# Altium PCB PPG.PcbDoc
Units mm, origin at the board's own origin, x right, y up, seen from the top; angles counter-clockwise.
Board outline 60.19 x 60.19 mm, 2 copper layers (Top Layer, Bottom Layer); 30 components, 27 nets, 107 pads, 22 vias.
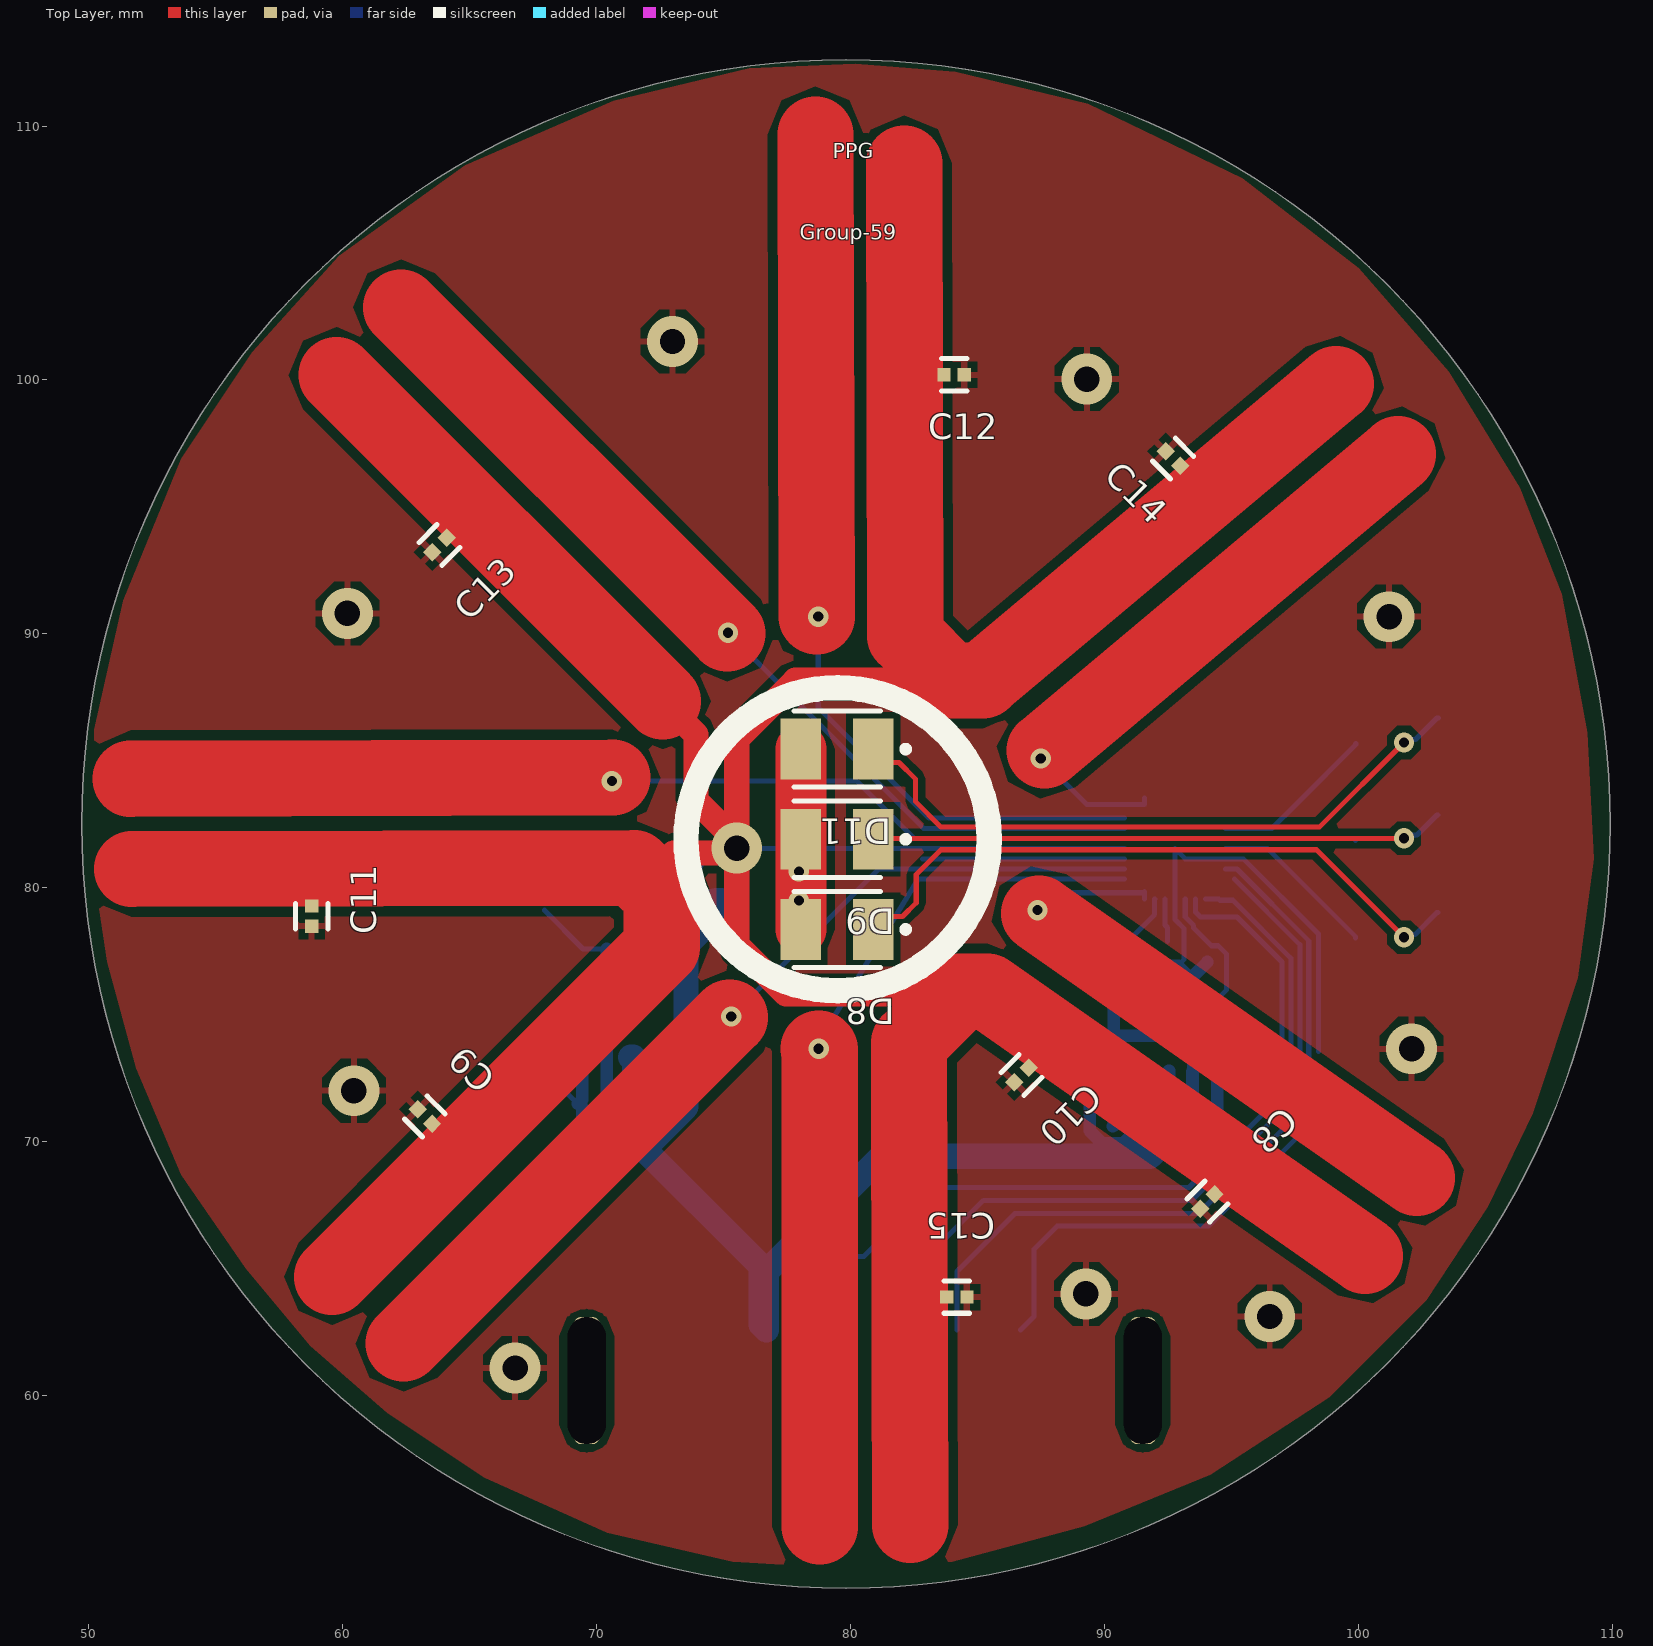
[diagram p0: Top Layer view]
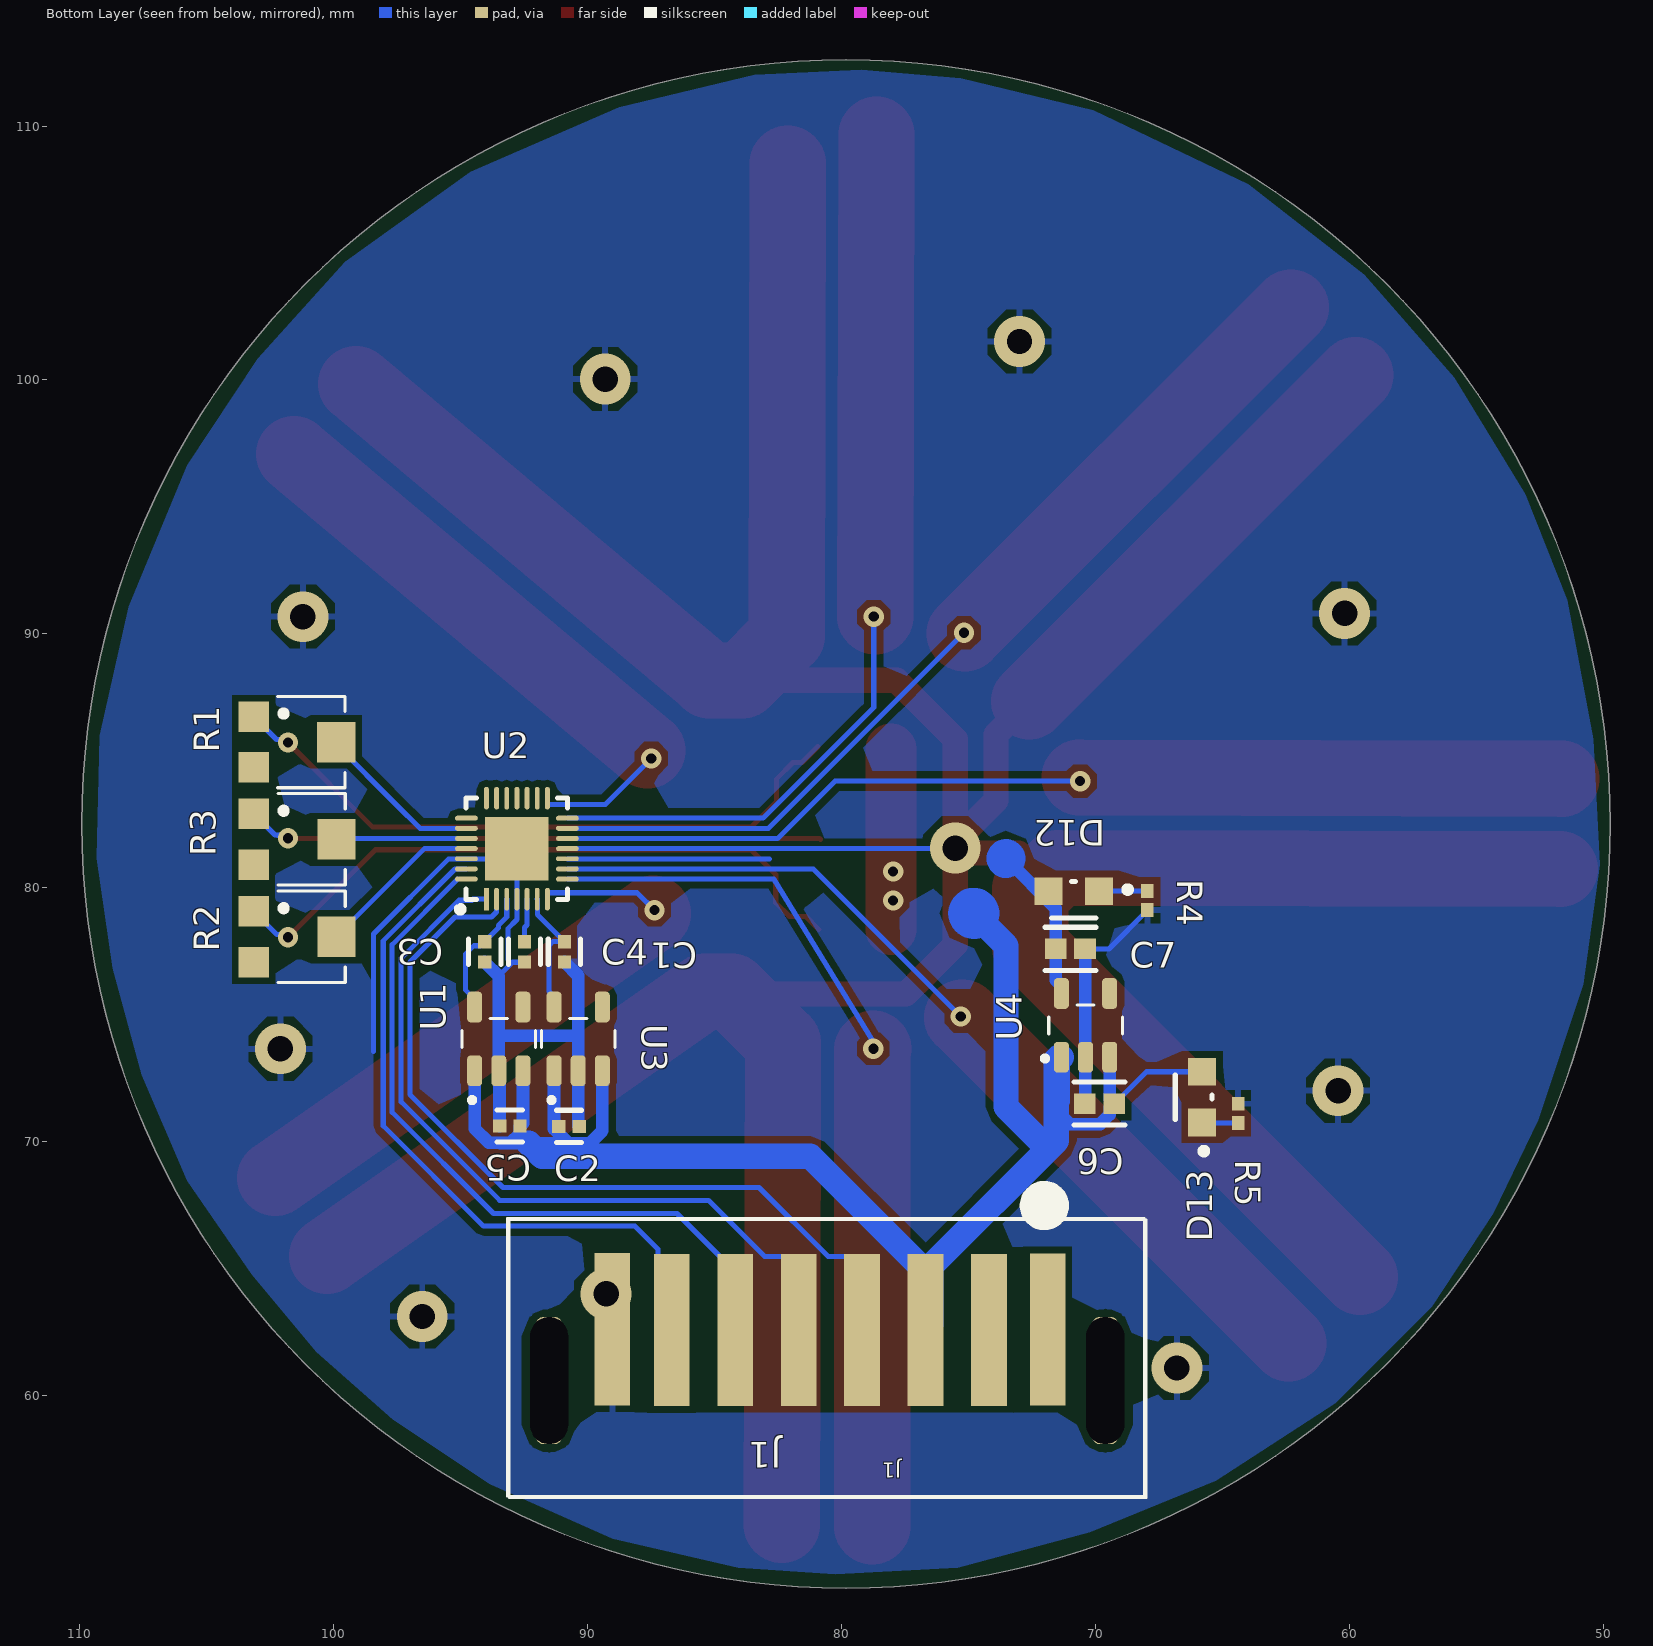
[diagram p1: Bottom Layer view, seen from below]
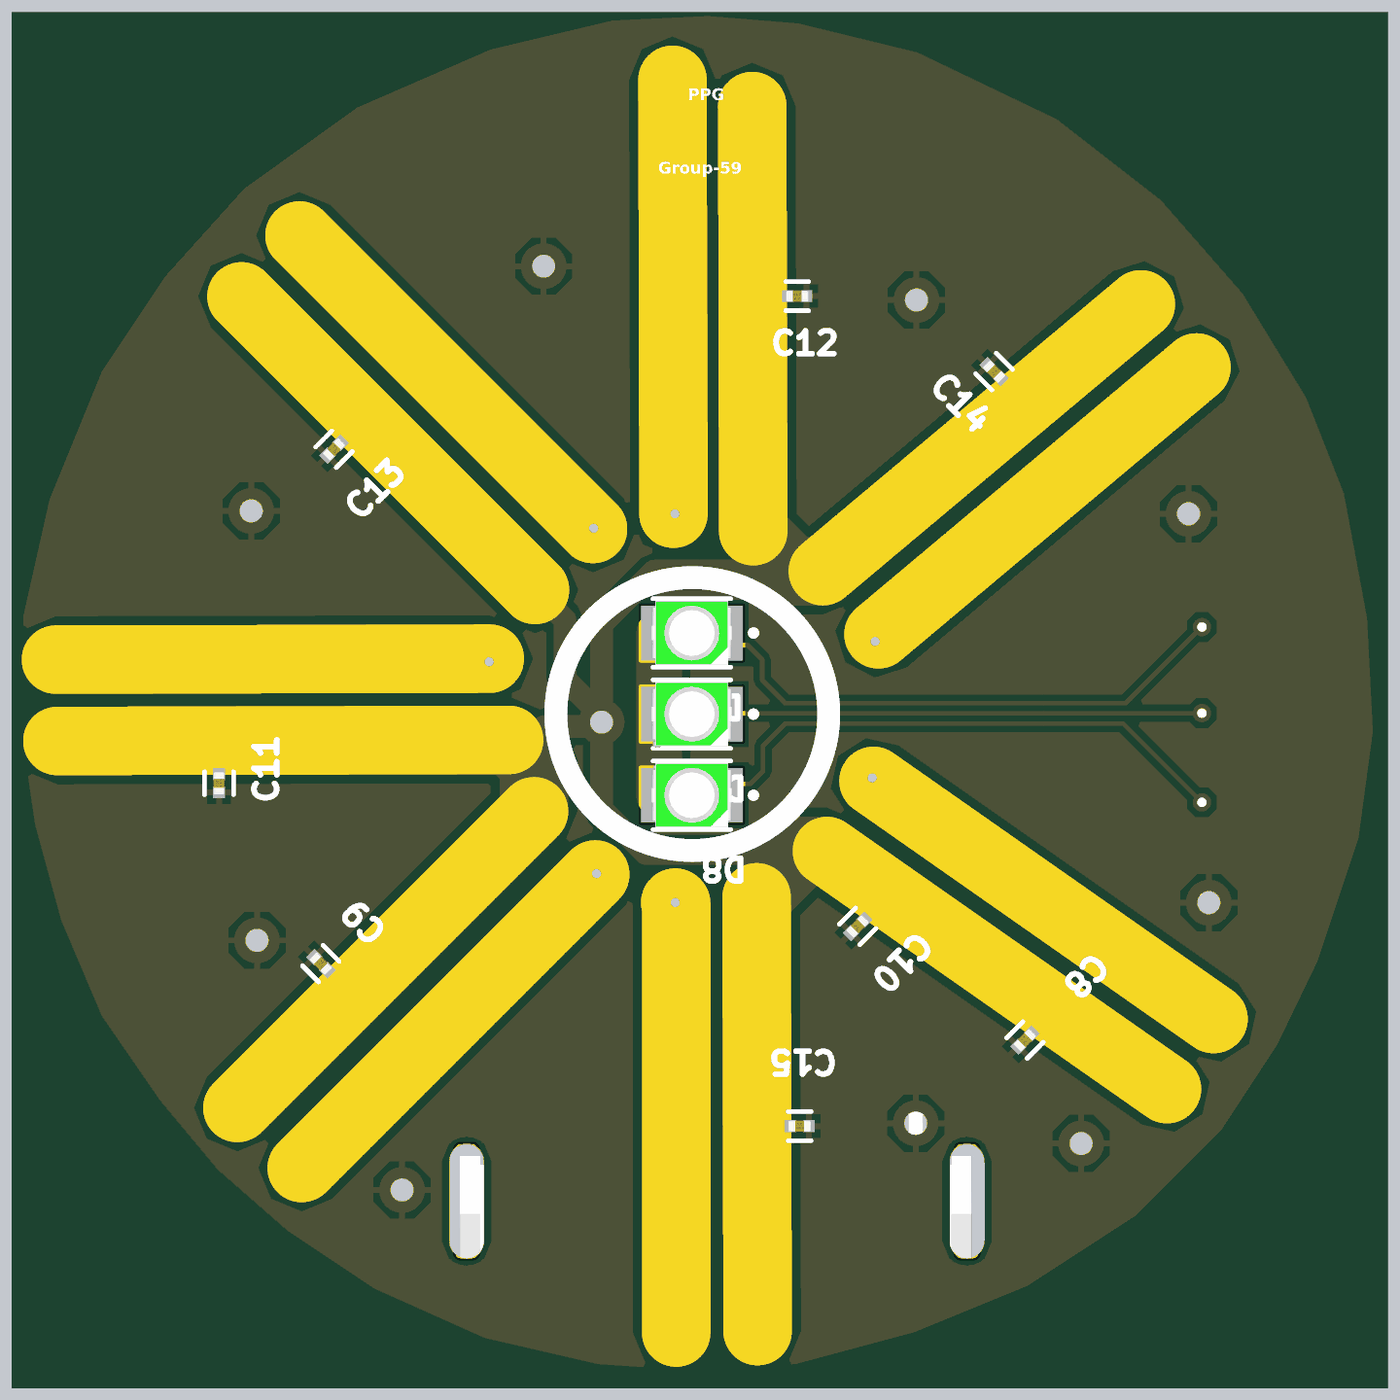
[diagram p2: 3D render of the assembled board from above, using the file's embedded part models]
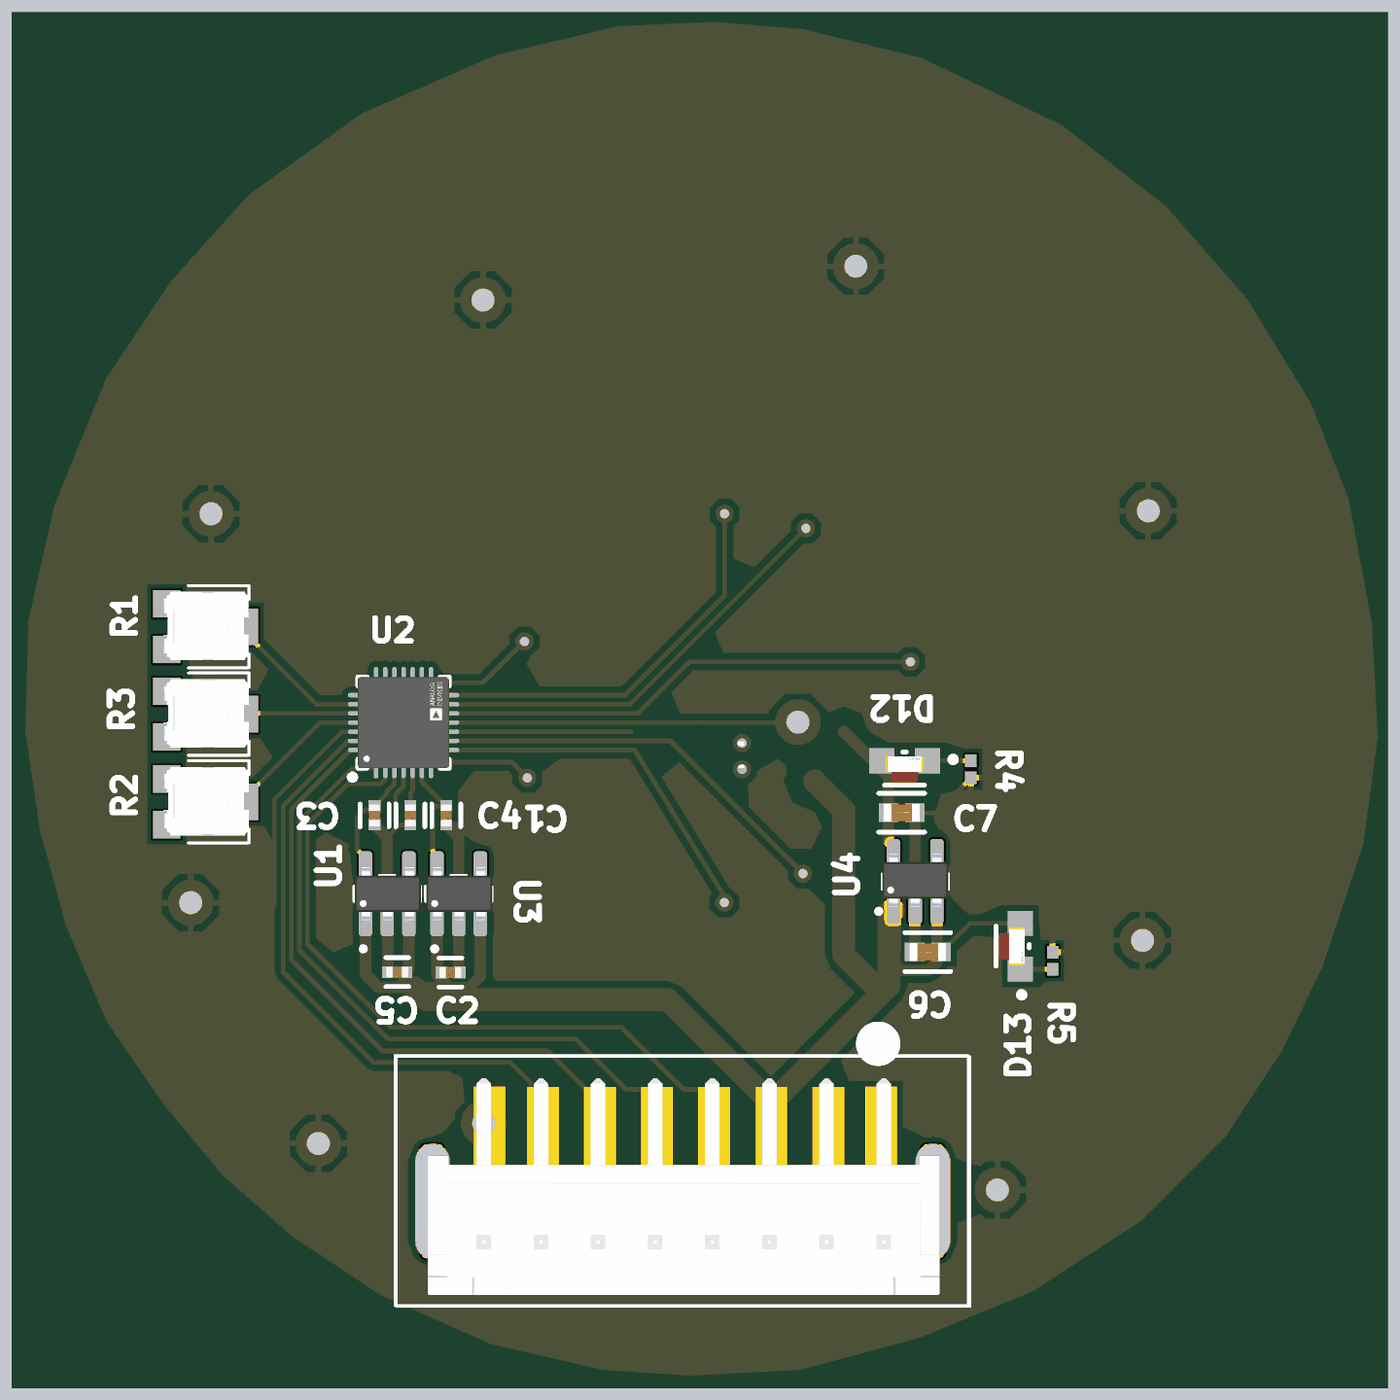
[diagram p3: 3D render of the assembled board from below, using the file's embedded part models]

## Layer stack, top to bottom
Top Solder: solder mask 0.0102, Solder Resist, Dk 3.5
Top Layer: signal copper 0.0356
Dielectric 1: dielectric 0.32, FR-4, Dk 4.8
Bottom Layer: signal copper 0.0356
Bottom Solder: solder mask 0.0102, Solder Resist, Dk 3.5

## Board outline
79.833,52.418 cw(c79.833,82.512) 49.738,82.512 cw(c79.833,82.512) 79.833,112.607 cw(c79.833,82.512) 109.927,82.512 cw(c79.833,82.512)

## Design rules (kind name [scope] priority, off if disabled: settings)
Clearance [All] p1: gap=0.254 ignorepadtopadclearanceinfootprint=FALSE except(0: Arc-Hole Track-Hole SMDPad-Hole THPad-Hole Via-Hole Fill-Hole Poly-Hole Region-Hole Text-Hole; 0.152: Arc-Arc Arc-Track Arc-SMDPad Track-Track Track-SMDPad SMDPad-SMDPad)
ComponentClearance [All] p1: gap=0.1 collisioncheckmode=3 verticalgap=2540 showdistances=FALSE
MinimumSolderMaskSliver [All] p1: minsoldermaskwidth=0.152
PolygonConnect [All] p1: connectstyle=Relief reliefconductorwidth=0.254 reliefentries=4 polygonreliefangle="90 Angle" airgapwidth=0.254
RoomDefinition PPG [InComponentClass('PPG')] p1: confinementstyle=ConfineIn formatcopy=TRUE lockcomponents=FALSE outline 5.842,46.482 112.522,46.482 112.522,113.538 5.842,113.538
RoutingVias [All] p1: holewidth=0.711 width=1.27 viastyle="Through Hole" minholewidth=0.711 minwidth=1.27 maxholewidth=0.711 maxwidth=1.27
SolderMaskExpansion [All] p1: expansion=0.102 istentingtop=FALSE
Width [All] p1: maxlimit=5 minlimit=0.152 preferedwidth=0.254
28 further rules are at their usual default settings.

## Components (designator, comment, footprint, x,y, rotation, side; value= is the part's Value field where it differs from the comment)
C1 "C0402C104K3RACTU" FP-C0402-BB-MFG 90.922,77.478 r270 bottom value="0.10 μF"
C2 "C0402C104K3RACTU" FP-C0402-BB-MFG 90.741,70.604 r180 bottom value="0.10 μF"
C3 "C0402C104K3RACTU" FP-C0402-BB-MFG 94.062,77.478 r270 bottom value="0.10 μF"
C4 "C0402C104K3RACTU" FP-C0402-BB-MFG 92.492,77.478 r270 bottom value="0.10 μF"
C5 "C0402C104K3RACTU" FP-C0402-BB-MFG 93.065,70.62 r0 bottom value="0.10 μF"
C6 "EMK107B7105KA-T" FP-0603-L_1_6_0_1-W_0_8_0-IPC_C 69.85,71.501 r0 bottom value=1uF
C7 "EMK107B7105KA-T" FP-0603-L_1_6_0_1-W_0_8_0-IPC_C 70.993,77.597 r180 bottom value=1uF
C8 "C0402C104K3RACTU" FP-C0402-BB-MFG 94.062,67.646 r225 top value="0.10 μF"
C9 "C0402C104K3RACTU" FP-C0402-BB-MFG 63.246,70.993 r135 top value="0.10 μF"
C10 "C0402C104K3RACTU" FP-C0402-BB-MFG 86.74,72.625 r225 top value="0.10 μF"
C11 "C0402C104K3RACTU" FP-C0402-BB-MFG 58.791,78.886 r270 top value="0.10 μF"
C12 "C0402C104K3RACTU" FP-C0402-BB-MFG 84.093,100.203 r0 top value="0.10 μF"
C13 "C0402C104K3RACTU" FP-C0402-BB-MFG 63.824,93.505 r45 top value="0.10 μF"
C14 "C0402C104K3RACTU" FP-C0402-BB-MFG 92.71,96.901 r315 top value="0.10 μF"
C15 "C0402C104K3RACTU" FP-C0402-BB-MFG 84.201,63.881 r180 top value="0.10 μF"
D8 "150141GS73100" WL-SMTW_3528 79.481,78.361 r180 top
D9 "150141GS73100" WL-SMTW_3528 79.481,81.911 r180 top
D11 "150141GS73100" WL-SMTW_3528 79.481,85.461 r180 top
D12 "LTST-S270KRKT" FP-LTST-S270KRKT-MFG 70.866,79.629 r0 bottom
D13 "LTST-S270KRKT" FP-LTST-S270KRKT-MFG 66.04,71.755 r90 bottom
J1 "S8B-XH-A(LF)(SN)" S8B-XH-A 69.149,60.322 r0 bottom
R1 "TC33X-2-103E" TC33X-2-103E 101.333,85.738 r180 bottom value=10kR
R2 "TC33X-2-103E" TC33X-2-103E 101.329,78.074 r180 bottom value=10kR
R3 "TC33X-2-103E" TC33X-2-103E 101.329,81.911 r180 bottom value=10kR
R4 "RK73H1ETTP1001F" RESC1005X40X25LL10T10 67.966,79.502 r90 bottom value=1kR
R5 "RK73H1ETTP1001F" RESC1005X40X25LL10T10 64.389,71.12 r270 bottom value=1kR
U1 "LP5907MFX-1.8/NOPB" LP5907MFX-1.8/NOPB 90.379,74.049 r90 bottom
U2 "ADPD1080WBCPZR7" ADPD1080WBCPZR7 92.792,81.542 r90 bottom
U3 "LP5907MFX-1.8/NOPB" LP5907MFX-1.8/NOPB 93.507,74.049 r90 bottom
U4 "LP5907MFX-3.3/NOPB" 296-38557-1-ND 70.485,74.676 r90 bottom

## Footprints (in the part's own frame and the unit in brackets; to place one, negate y for a bottom-side part, rotate by r counter-clockwise, add the part's x,y. Pads: shape width x height; smd on the part's side, far side on the other; paste and mask are expansions set on the pad)
296-38557-1-ND [mm]
  rrect50% 1.21x0.59 smd: 1(-1.346,0.864) 2(-1.346,-0.086) 3(-1.346,-1.036) 4(1.164,-1.036) 5(1.164,0.864)
  silkscreen extent -1.5,-1.54 0.71,1.61, body extent -1.44,-1.53 1.36,1.37, height 1.31
ADPD1080WBCPZR7 [mm]
  rect 0.894x0.192 smd paste+0 mask+0: 1(-1.989,1.2)
  rrect100% 0.894x0.192 smd paste+0 mask+0: 2(-1.989,0.8) 3(-1.989,0.4) 4(-1.989,0) 5(-1.989,-0.4) 6(-1.989,-0.8) 7(-1.989,-1.2) 15(1.989,-1.2) 16(1.989,-0.8) 17(1.989,-0.4) 18(1.989,0) 19(1.989,0.4) 20(1.989,0.8) 21(1.989,1.2)
  rrect100% 0.192x0.894 smd paste+0 mask+0: 8(-1.2,-1.989) 9(-0.8,-1.989) 10(-0.4,-1.989) 11(0,-1.989) 12(0.4,-1.989) 13(0.8,-1.989) 14(1.2,-1.989) 22(1.2,1.989) 23(0.8,1.989) 24(0.4,1.989) 25(0,1.989) 26(-0.4,1.989) 27(-0.8,1.989) 28(-1.2,1.989)
  rect 2.5x2.5 smd paste-1000 mask+0: 29(0,0)
  silkscreen extent -2.51,-2 2,2.36, body extent -2,-2 2,2, height 0.8
FP-0603-L_1_6_0_1-W_0_8_0-IPC_C [mm]
  rect 0.858x0.812 smd paste+0 mask+0: 1(-0.577,0) 2(0.577,0)
  silkscreen extent -1.01,-0.85 1.01,0.85, body extent -0.8,-0.4 0.8,0.4, height 0.9
FP-C0402-BB-MFG [mm]
  rect 0.52x0.52 smd paste+0 mask+0: 1(-0.4,0) 2(0.4,0)
  silkscreen extent -0.5,-0.64 0.5,0.64, body extent -0.5,-0.25 0.5,0.25, height 0.55
FP-LTST-S270KRKT-MFG [mm]
  rect 1.1x1.1 smd paste+0 mask+0: 1(-1,-0.235) 2(1,-0.235)
  silkscreen extent -2.25,-0.63 0.87,0.82, body extent -0.82,-0.44 0.82,0.71, height 0.6
LP5907MFX-1.8/NOPB [mm]
  rrect50% 1.21x0.59 smd mask+0: 1(-1.255,0.95) 2(-1.255,0) 3(-1.255,-0.95)
  rrect50% 1.21x0.59 smd: 4(1.255,-0.95) 5(1.255,0.95)
  silkscreen extent -2.51,-1.45 0.8,1.45, body extent -1.4,-1.48 1.4,1.42, height 1.31
RESC1005X40X25LL10T10 [mm] "Chip Resistor, 2-Leads, Body 1.00x0.50mm, IPC High Density"
  rect 0.55x0.5 smd: 1(-0.375,0) 2(0.375,0)
  body extent -0.55,-0.3 0.55,0.3, height 0.4
S8B-XH-A [mm]
  rect 1.4x6 smd paste-1000 mask+0: 1(2.743,-2.285) 2(5.053,-2.265) 3(7.553,-2.265) 4(10.053,-2.265) 5(12.553,-2.265) 6(15.053,-2.265) 7(17.553,-2.265) 8(19.886,-2.288)
  rrect50% 1x5 hole 1.5 slot 5 at 90 deg: 25(0.476,-0.273) 25(22.376,-0.273)
  silkscreen extent -1.14,-7.63 24.03,4.34, body extent 0.18,-5.66 22.58,3.84, height 9.53
TC33X-2-103E [mm]
  rect 1.2x1.2 smd: 1(-1.825,1) 3(-1.825,-1)
  rect 1.5x1.6 smd: 2(1.425,0)
  silkscreen extent -0.88,-1.8 1.77,1.8, body extent -1.97,-1.47 1.83,1.53, height 1.1
WL-SMTW_3528 [mm] "SMD Mono-color TOP LED, body 3.2x2.8mm"
  rect 1.6x2.4 smd: 1(-1.425,0) 2(1.425,0)
  silkscreen extent -2.83,-1.5 1.7,1.5, body extent -1.75,-1.4 1.75,1.4, height 1.9

## Part data
C1 C2 C3 C4 C5 C8 C9 C10 C11 C12 C13 C14 C15: library part CMP-03020-012858-1, "Cap Ceramic 0.1uF 25V X7R 10% Pad SMD 0402 125C T/R", Capacitance="0.10 μF", Case Code (Imperial)=0402, Case Code (Metric)=1005, Dielectric=X7R, Dielectric Material=4241ConductorMaterial, Manufacturer=Kemet, Max Operating Temperature=125°C, Min Operating Temperature=-55°C, Package=C0402-BB, Supplier Part Number=399-14148-1-ND, Temperature="-55°C to +125°C", Temperature Coefficient=15%, Temperature Range High=+125°C, Tolerance=0.1, Voltage Rating="25 V", Voltage Rating (DC)=25V, Automotive=No, Case/Package=0402, Category=Cap, ComponentLink1Description=http://www.farnell.com/datasheets/2746129.pdf?src-supplier=Farnell, ComponentLink1URL=http://www.farnell.com/datasheets/2746129.pdf?src-supplier=Farnell, ComponentLink2Description=Datasheet, ComponentLink2URL=https://content.kemet.com/datasheets/KEM_C1002_X7R_SMD.pdf, ComponentLink3Description=http://www.farnell.com/datasheets/2746129.pdf?src-supplier=Newark, ComponentLink3URL=http://www.farnell.com/datasheets/2746129.pdf?src-supplier=Newark, ComponentLink4Description=http://www.farnell.com/datasheets/2746129.pdf?src-supplier=Element14, ComponentLink4URL=http://www.farnell.com/datasheets/2746129.pdf?src-supplier=Element14, ComponentLink5Description=https://datasheet.octopart.com/C0402C104K3RACTU-Kemet-datasheet-62095741.pdf?src-supplier=Element14, ComponentLink5URL=https://datasheet.octopart.com/C0402C104K3RACTU-Kemet-datasheet-62095741.pdf?src-supplier=Element14, ComponentLink6Description=https://api.kemet.com/component-edge/download/datasheet/C0402C104K3RAC7867.pdf?src-supplier=Digikey, ComponentLink6URL=https://api.kemet.com/component-edge/download/datasheet/C0402C104K3RAC7867.pdf?src-supplier=Digikey, ComponentLink7Description=https://datasheet.octopart.com/C0402C104K3RACTU-KEMET-datasheet-176289272.pdf?src-supplier=Newark, ComponentLink7URL=https://datasheet.octopart.com/C0402C104K3RACTU-KEMET-datasheet-176289272.pdf?src-supplier=Newark, ComponentLink8Description=https://datasheet.octopart.com/C0402C104K3RACTU-KEMET-datasheet-157246124.pdf?src-supplier=Electro+Sonic, ComponentLink8URL=https://datasheet.octopart.com/C0402C104K3RACTU-KEMET-datasheet-157246124.pdf?src-supplier=Electro+Sonic, Device Class L1="Passive Components", Device Class L2=Capacitors, Device Class L3="Ceramic Capacitors", Digikey Description="Cap Ceramic 0.1uF 25V X7R 10% Pad SMD 0402 125C T/R", Height=0.55mm, Ipc Land Pattern Name=CAPC10050X50, Lead Free=Yes, Manufacturer Part Number=C0402C104K3RACTU, Material=Ceramic, Mouser Description="Cap Ceramic 0.1uF 25V X7R 10% Pad SMD 0402 125C T/R", Octopart=https://octopart.com/c0402c104k3ractu-kemet-71105629, Packaging="Cut Tape", Pins=2NUMBER, Pricing="1=0.16, 10=0.095, 100=0.0611, 1000=0.04279, 2500=0.03794, 5000=0.0349 (USD)", Reach SVHC Compliant=No, RoHS=TRUE, RoHS Compliant=Yes, Stock=453452, Supplier=Digikey, Temperature Characteristic=X7R, Temperature Range Low=-55°C
C6 C7: library part CMP-14477-000018-3, "None", Capacitance=1uF, Case Code (Imperial)=0603, Case Code (Metric)=1608, Dielectric=X7R, Manufacturer="Taiyo Yuden", Max Operating Temperature=125°C, Min Operating Temperature=-55°C, Package Quantity=1, Resistor Type=Ceramic, Supplier Part Number=587-1241-1-ND, Tolerance=10%, Voltage Rating=16V, Case/Package=0603, Category="Ceramic Capacitors", ComponentLink1Description=https://datasheet.ciiva.com/5815/1697718-5815968.pdf?src-supplier=Farnell, ComponentLink1URL=https://datasheet.ciiva.com/5815/1697718-5815968.pdf?src-supplier=Farnell, ComponentLink2Description=https://datasheet.ciiva.com/30212/193emk107b7105ka-t-30212019.pdf?src-supplier=Onlinecomponents.com, ComponentLink2URL=https://datasheet.ciiva.com/30212/193emk107b7105ka-t-30212019.pdf?src-supplier=Onlinecomponents.com, ComponentLink3Description=https://datasheet.ciiva.com/15920/966emk107b7105ka-t-15920470.pdf?src-supplier=Onlinecomponents.com, ComponentLink3URL=https://datasheet.ciiva.com/15920/966emk107b7105ka-t-15920470.pdf?src-supplier=Onlinecomponents.com, ComponentLink4Description=https://datasheet.ciiva.com/30137/126emk107b7105ka-t-30137199.pdf?src-supplier=Onlinecomponents.com, ComponentLink4URL=https://datasheet.ciiva.com/30137/126emk107b7105ka-t-30137199.pdf?src-supplier=Onlinecomponents.com, ComponentLink5Description=https://datasheet.ciiva.com/132/emk107b7105ka-t-ss-132544.pdf?src-supplier=Digikey, ComponentLink5URL=https://datasheet.ciiva.com/132/emk107b7105ka-t-ss-132544.pdf?src-supplier=Digikey, ComponentLink6Description=https://datasheet.ciiva.com/26871/getdatasheetpartid-637486-26871306.pdf?src-supplier=Verical, ComponentLink6URL=https://datasheet.ciiva.com/26871/getdatasheetpartid-637486-26871306.pdf?src-supplier=Verical, ComponentLink7Description=https://datasheet.ciiva.com/7657/1697718-7657322.pdf?src-supplier=Element14, ComponentLink7URL=https://datasheet.ciiva.com/7657/1697718-7657322.pdf?src-supplier=Element14, ComponentLink8Description=https://datasheet.ciiva.com/7975/746258-7975612.pdf?src-supplier=Element14, ComponentLink8URL=https://datasheet.ciiva.com/7975/746258-7975612.pdf?src-supplier=Element14, Construction=Flat, Contact Plating=Nickel, Depth=0.8mm, Halogen Free="Halogen Free", Height=0.8mm, Lead Free="Lead Free", Length=1.6mm, Manufacturer Part Number=EMK107B7105KA-T, Material=4241ConductorMaterial, Mount="Surface Mount", Mounting Technology="Surface Mount", Number of Pins=2, Packaging="Tape and Reel", Pins=2, Pricing="1=0.08, 10=0.027, 50=0.022, 100=0.0168, 500=0.0152, 1000=0.0136 (USD)", Radiation Hardening=No, REACH SVHC="No SVHC", Reach SVHC Compliant=No, RoHS=Yes, RoHS Compliant=Yes, Series=M, Stock=1580663, Supplier=Digikey, Termination=SMD/SMT, Thickness=0.035inch, Voltage Rating (DC)=16V, Width=0.031inch
D8 D9 D11: library part CMP-1429-00004-2, Case Code (Imperial)=1411, Case Code (Metric)=3528, Color=Green, Forward Current=100mA, Forward Voltage=3.1V, Lens Color=Colorless, Manufacturer="Wurth Electronics", Max Operating Temperature=85°C, Max Reverse Voltage (DC)=5V, Min Operating Temperature=-40°C, Package Quantity=1, Power Dissipation=105mW, Supplier Part Number=732-4997-1-ND, Test Current=20mA, Case/Package=3528, Category=LEDs, ComponentLink1Description=https://datasheet.ciiva.com/23843/150141gs73100-23843266.pdf?src-supplier=Newark, ComponentLink1URL=https://datasheet.ciiva.com/23843/150141gs73100-23843266.pdf?src-supplier=Newark, ComponentLink2Description=https://datasheet.ciiva.com/29278/759463-da-01-en-smd-topled-einf-gruen-150141gs73100-29278953.pdf?src-supplier=Conrad, ComponentLink2URL=https://datasheet.ciiva.com/29278/759463-da-01-en-smd-topled-einf-gruen-150141gs73100-29278953.pdf?src-supplier=Conrad, ComponentLink3Description=https://datasheet.ciiva.com/22656/1911484-22656997.pdf?src-supplier=Element14, ComponentLink3URL=https://datasheet.ciiva.com/22656/1911484-22656997.pdf?src-supplier=Element14, ComponentLink4Description=https://datasheet.ciiva.com/48430/150141gs73100-eng-tds-48430060.pdf?src-supplier=Distrelec, ComponentLink4URL=https://datasheet.ciiva.com/48430/150141gs73100-eng-tds-48430060.pdf?src-supplier=Distrelec, ComponentLink5Description=https://datasheet.ciiva.com/29563/150141gs73100-29563029.pdf?src-supplier=Digikey, ComponentLink5URL=https://datasheet.ciiva.com/29563/150141gs73100-29563029.pdf?src-supplier=Digikey, ComponentLink6Description=https://datasheet.ciiva.com/29563/150141gs73100-29563030.pdf?src-supplier=Digikey, ComponentLink6URL=https://datasheet.ciiva.com/29563/150141gs73100-29563030.pdf?src-supplier=Digikey, Dominant Wavelength=525nm, Height=1.9mm, Lead Free="Lead Free", Length=3.5mm, Lens Size=2.4mm, Lens Style="Clear, Round", Lens Transparency=Clear, Luminous Intensity=1cd, Manufacturer Part Number=150141GS73100, Mount="Surface Mount", Mounting Technology="Surface Mount", NexarPartId=29717794, Packaging="Tape and Reel", Peak Wavelength=515nm, Pricing="1=0.17, 50=0.1684, 100=0.1467, 500=0.115 (USD)", REACH SVHC=Unknown, Reach SVHC Compliant=Unknown, Reverse Voltage=5V, RoHS=Compliant, RoHS Compliant=Yes, Series=WL-SMTW, Stock=36143, Supplier=Digikey, Viewing Angle=120°, Wavelength=525nm, Width=2.8mm
D12 D13: library part CMP-2000-06630-2, "LED RED CLEAR CHIP SMD R/A", Case Code (Imperial)=0603, Case Code (Metric)=1608, Color=Red, Forward Current=30mA, Forward Voltage=2V, Lens Color=Colorless, Manufacturer="Vishay Lite-On", Max Operating Temperature=85°C, Max Power Dissipation=75mW, Min Operating Temperature=-55°C, Package Quantity=1, Reverse Voltage=5V, Supplier Part Number=160-1479-1-ND, Test Current=20mA, Case/Package=0603, Category=LEDs, ComponentLink1Description=https://datasheet.ciiva.com/11775/0900766b80dc0b8e-11775445.pdf?src-supplier=Rs, ComponentLink1URL=https://datasheet.ciiva.com/11775/0900766b80dc0b8e-11775445.pdf?src-supplier=Rs, ComponentLink2Description=https://datasheet.ciiva.com/12400/ltst-s270krkt-201849-12400833.pdf?src-supplier=Mouser, ComponentLink2URL=https://datasheet.ciiva.com/12400/ltst-s270krkt-201849-12400833.pdf?src-supplier=Mouser, ComponentLink3Description=https://datasheet.ciiva.com/2110/ltst-s270krkt-2110021.pdf?src-supplier=Digikey, ComponentLink3URL=https://datasheet.ciiva.com/2110/ltst-s270krkt-2110021.pdf?src-supplier=Digikey, ComponentLink4Description=https://datasheet.ciiva.com/16387/p-100-ltst-s270krkt-16387507.pdf?src-supplier=Future+Electronics, ComponentLink4URL=https://datasheet.ciiva.com/16387/p-100-ltst-s270krkt-16387507.pdf?src-supplier=Future+Electronics, ComponentLink5Description=https://datasheet.ciiva.com/2110/s-110-ltst-s270krkt-2110023.pdf?src-supplier=Digikey, ComponentLink5URL=https://datasheet.ciiva.com/2110/s-110-ltst-s270krkt-2110023.pdf?src-supplier=Digikey, ComponentLink6Description=https://datasheet.ciiva.com/2110/s-110-ltst-s270krkt-2110022.pdf?src-supplier=Digikey, ComponentLink6URL=https://datasheet.ciiva.com/2110/s-110-ltst-s270krkt-2110022.pdf?src-supplier=Digikey, Depth=0.6mm, Dominant Wavelength=631nm, Height=0.6mm, Illumination Color=Red, Lead Free="Lead Free", Length=1.6mm, Lens Size=0.6mm, Lens Style=Diffused, Lens Transparency=Clear, Luminous Intensity=54mcd, Manufacturer Part Number=LTST-S270KRKT, Mount="Surface Mount", Mounting Technology="Surface Mount", Number of Elements=1, Number of LEDs=1, Number of Pins=2, Packaging="Tape and Reel", Pins=2, Power Dissipation=75mW, Power Rating=75mW, Pricing="1=0.24, 10=0.133, 100=0.0617, 500=0.05696, 1000=0.04462, 2000=0.04367 (USD)", Radiation Hardening=No, RoHS=Yes, RoHS Compliant=Yes, Series=-, Stock=83540, Supplier=Digikey, Viewing Angle=130°, Wavelength=639nm, Width=1.15mm
J1: "Conn Shrouded Header (4 Sides) HDR 8 POS 2.5mm Solder RA Thru-Hole Box", Contact Resistance=20mR, Current Rating=3A, Flammability Rating="UL94 V-0", Housing Color=White, Insulation Color=Natural, Manufacturer=JST, Max Operating Temperature=85°C, Max Voltage Rating (AC)=250V, Min Operating Temperature=-25°C, Supplier Part Number=306-S8B-XH-ALFSN, Category="Headers and Wire Housings", ComponentLink1Description=https://datasheet.ciiva.com/26894/getdatasheetpartid-748678-26894649.pdf?src-supplier=Verical, ComponentLink1URL=https://datasheet.ciiva.com/26894/getdatasheetpartid-748678-26894649.pdf?src-supplier=Verical, ComponentLink2Description=https://datasheet.ciiva.com/726/exh-726382.pdf?src-supplier=Digikey, ComponentLink2URL=https://datasheet.ciiva.com/726/exh-726382.pdf?src-supplier=Digikey, ComponentLink3Description=https://datasheet.ciiva.com/16484/exh-16484633.pdf?src-supplier=Future+Electronics, ComponentLink3URL=https://datasheet.ciiva.com/16484/exh-16484633.pdf?src-supplier=Future+Electronics, Connector Type=Header, Contact Finish - Mating=TIN, Contact Material=Brass, Contact Plating=Tin,Copper,Lead, Contact Shape=Square, Contact Type="Male Pin", Depth=11.5mm, Fastening Type=Detent, Housing Material=Polyamide, Insulation Material=Nylon, Length=22.4mm, Manufacturer Part Number=S8B-XH-A(LF)(SN), Max Current Rating=3A, Mounting Technology="Through Hole", Number of Contacts=8, Number of Positions=8, Number of Rows=1, Orientation="Right Angle", Packaging=Bulk, Pitch=2.5mm, Pricing="1=0.31, 10=0.278, 50=0.278, 100=0.197, 1000=0.159, 10000=0.159 (USD)", Reach SVHC Compliant=No, RoHS=Yes, Series=XH, Stock=23372, Supplier=Mouser, Supplier 1=Mouser, Supplier Part Number 1=306-S8B-XH-ALFSN, Termination=Solder, Voltage Rating=250V
R1 R2 R3: "Cermet trimmer potentiometer, 10 kΩ, 0.1 W, SMD, on top, TC33X-2-103E", Color=Silver, Manufacturer=Bourns, Max Operating Temperature=100°C, Max Power Dissipation=100mW, Min Operating Temperature=-40°C, Package Quantity=1, Resistance Tolerance=25%, Resistor Type=Cermet, Supplier Part Number=TC33X-103ECT-ND, Temperature Coefficient=250ppm/°C, Voltage Rating (DC)=50V, Category="Variable Resistors and Potentiometers", ComponentLink1Description=https://datasheet.ciiva.com/11830/0900766b802749b3-11830705.pdf?src-supplier=Rs, ComponentLink1URL=https://datasheet.ciiva.com/11830/0900766b802749b3-11830705.pdf?src-supplier=Rs, ComponentLink2Description=https://datasheet.ciiva.com/7953/1818686-7953349.pdf?src-supplier=Element14, ComponentLink2URL=https://datasheet.ciiva.com/7953/1818686-7953349.pdf?src-supplier=Element14, ComponentLink3Description=https://datasheet.ciiva.com/28659/1520225-28659212.pdf?src-supplier=Element14, ComponentLink3URL=https://datasheet.ciiva.com/28659/1520225-28659212.pdf?src-supplier=Element14, ComponentLink4Description=https://datasheet.ciiva.com/2155/tc33-2155963.pdf?src-supplier=Digikey, ComponentLink4URL=https://datasheet.ciiva.com/2155/tc33-2155963.pdf?src-supplier=Digikey, ComponentLink5Description=https://datasheet.ciiva.com/2155/tc33-2155964.pdf?src-supplier=Digikey, ComponentLink5URL=https://datasheet.ciiva.com/2155/tc33-2155964.pdf?src-supplier=Digikey, ComponentLink6Description=https://datasheet.ciiva.com/2155/tc33-2155962.pdf?src-supplier=Digikey, ComponentLink6URL=https://datasheet.ciiva.com/2155/tc33-2155962.pdf?src-supplier=Digikey, ComponentLink7Description=https://datasheet.ciiva.com/8089/tc33-8089484.pdf?src-supplier=Avnet, ComponentLink7URL=https://datasheet.ciiva.com/8089/tc33-8089484.pdf?src-supplier=Avnet, ComponentLink8Description=https://datasheet.ciiva.com/26944/getdatasheetpartid-183773-26944166.pdf?src-supplier=Verical, ComponentLink8URL=https://datasheet.ciiva.com/26944/getdatasheetpartid-183773-26944166.pdf?src-supplier=Verical, Depth=3.8mm, Height=0.047inch, Lead Free="Lead Free", Length=3mm, Manufacturer Part Number=TC33X-2-103E, Military Standard=Not, Mounting Technology="Surface Mount", Number of Turns=1, Packaging="Tape and Reel", Power Rating=100mW, Pricing="1=0.33, 10=0.267, 25=0.2448, 50=0.2292, 100=0.2147, 250=0.19668, 500=0.18402, 1000=0.17215 (USD)", Radiation Hardening=No, Reach SVHC Compliant=No, RoHS=Yes, RoHS Compliant=Yes, Series=TC33, Stock=58293, Supplier=Digikey, Supplier 1=Digikey, Supplier Part Number 1=TC33X-103ECT-ND, Taper=Linear, Termination="Foot Print", Tolerance=25%, Weight=29.4mg, Width=0.118inch
R4 R5: library part CMP-2002-03808-1, Case Code (Imperial)=0402, Case Code (Metric)=1005, Manufacturer="KOA Speer", Max Operating Temperature=155°C, Max Power Dissipation=100mW, Min Operating Temperature=-55°C, Package Quantity=10000, Power Rating=63mW, Ratings=AEC-Q200, Supplier Part Number=2019-RK73H1ETTP1001FCT-ND, Temperature Coefficient=100ppm/°C, Tolerance=1%, Voltage Rating=50V, Case/Package=0402, Category="Chip SMD Resistors", ComponentLink1Description=https://datasheet.ciiva.com/5554/rk73h-5554172.pdf?src-supplier=Mouser, ComponentLink1URL=https://datasheet.ciiva.com/5554/rk73h-5554172.pdf?src-supplier=Mouser, Construction=Rectangular, Depth=0.5mm, Features="Moisture Resistant,Automotive AEC-Q200", Height=0.35mm, Lead Free=5697LeadFree, Length=1mm, Manufacturer Part Number=RK73H1ETTP1001F, Military Standard=Not, Mounting Technology="Surface Mount", Number of Terminations=2, Packaging="Tape and Reel", Part Number=RK73H1ETTP1001F, Pricing="1=0.1, 10=0.021, 50=0.0134, 100=0.0112, 500=0.00764, 1000=0.00658, 5000=0.00478 (USD)", RoHS=Yes, RoHS Compliant=Yes, Series=RK73H, Stock=1021606, Supplier=Digikey, Technology="THICK FILM", Termination=SMD/SMT, Voltage Rating (DC)=50V, Width=0.5mm
U1 U3: "LDO Regulator Pos 1.8V 0.25A 5-Pin SOT-23 T/R", Case/Package=SOT-23-5, Dropout Voltage=250mV, Manufacturer="Texas Instruments", Max Operating Temperature=125°C, Max Supply Current=425uA, Max Supply Voltage=5.5V, Min Input Voltage=2.2V, Min Operating Temperature=-40°C, Min Output Voltage=1.8V, Output Current=250mA, Package Quantity=3000, Power Supply Rejection Ratio (PSRR)=60dB, Quiescent Current=25uA, Supplier Part Number=595-LP5907MFX-1.8NPB, Supplier Part Number 1=296-41463-1-ND, Category="Voltage Regulators - Linear", ComponentLink1Description=https://media.digikey.com/pdf/Data%20Sheets/Texas%20Instruments%20PDFs/ConnectedSensorAutoSystemsGuide.pdf?src-supplier=Digikey, ComponentLink1URL=https://media.digikey.com/pdf/Data%20Sheets/Texas%20Instruments%20PDFs/ConnectedSensorAutoSystemsGuide.pdf?src-supplier=Digikey, ComponentLink2Description=http://www.ti.com/general/docs/lit/getliterature.tsp?genericPartNumber=LP5907&fileType=pdf&src-supplier=Farnell, ComponentLink2URL=http://www.ti.com/general/docs/lit/getliterature.tsp?genericPartNumber=LP5907&fileType=pdf&src-supplier=Farnell, ComponentLink3Description=http://www.ti.com/general/docs/lit/getliterature.tsp?genericPartNumber=LP5907&amp;&amp;fileType=pdf&src-supplier=Element14, ComponentLink3URL=http://www.ti.com/general/docs/lit/getliterature.tsp?genericPartNumber=LP5907&amp;&amp;fileType=pdf&src-supplier=Element14, ComponentLink4Description=http://www.ti.com/lit/pdf/szzy004?src-supplier=Digikey, ComponentLink4URL=http://www.ti.com/lit/pdf/szzy004?src-supplier=Digikey, ComponentLink5Description=http://www.ti.com/lit/gpn/lp5907?src-supplier=Mouser, ComponentLink5URL=http://www.ti.com/lit/gpn/lp5907?src-supplier=Mouser, ComponentLink6Description=http://www.ti.com/general/docs/lit/getliterature.tsp?genericPartNumber=LP5907&&fileType=pdf&src-supplier=Avnet, ComponentLink6URL=http://www.ti.com/general/docs/lit/getliterature.tsp?genericPartNumber=LP5907&&fileType=pdf&src-supplier=Avnet, Lead Free="Lead Free", Manufacturer Part Number=LP5907MFX-1.8/NOPB, Mounting Technology="Surface Mount", Nominal Output Voltage=1.8V, Number of Outputs=1, Number of Regulators=1, Output Configuration=Positive, Output Type=Fixed, Output Voltage=1.8V, Packaging="Tape and Reel", Pins=5, Pricing="1=0.45, 10=0.277, 50=0.277, 100=0.229, 1000=0.212, 10000=0.197 (USD)", Reach SVHC Compliant=No, RoHS=Yes, RoHS Compliant=Yes, Series=-, Stock=22864, Supplier=Mouser, Supplier 1=Digikey
U2: "Optical Afe For Health Monitorin", Supplier Part Number 1=505-ADPD1080WBCPZR7CT-ND, Supplier 1=Digikey
U4: "250-mA ultra-low-noise low-IQ low-dropout (LDO) linear regulator 5-SOT-23 -40 to 125", Case/Package=SOT-23-5, Dropout Voltage=250mV, Manufacturer="Texas Instruments", Max Operating Temperature=125°C, Max Output current=250mA, Max Supply Current=425uA, Max Supply Voltage=5.5V, Min Input Voltage=2.2V, Min Operating Temperature=-40°C, Nominal Output Voltage=3.3V, Nominal Supply Current=12uA, Package Quantity=3000, Power Supply Rejection Ratio (PSRR)=60dB, Quiescent Current=25uA, Supplier Part Number=296-38557-1-ND, Accuracy=2%, Category="Voltage Regulators - Linear", ComponentLink1Description=https://datasheet.ciiva.com/48475/lp5907-48475084.pdf?src-supplier=Avnet, ComponentLink1URL=https://datasheet.ciiva.com/48475/lp5907-48475084.pdf?src-supplier=Avnet, Height=1.45mm, Lead Free="Lead Free", Length=2.9mm, Manufacturer Part Number=LP5907MFX-3.3/NOPB, Min Supply Voltage=2.2V, Mounting Technology="Surface Mount", Number of Channels=1NUMBER, Number of Outputs=1, Number of Regulators=1, Output Configuration=Positive, Output Current=250mA, Output Type=Fixed, Output Voltage=3.3V, Packaging="Tape and Reel", Pins=5, Polarity=Positive, Pricing="1=0.45, 10=0.314, 25=0.2804, 100=0.2431, 250=0.22532, 500=0.21458, 1000=0.20576 (USD)", Radiation Hardening=No, Reach SVHC Compliant=No, RoHS=Yes, RoHS Compliant=Yes, Series=-, Stock=10289, Supplier=Digikey, Supplier 1=Digikey, Supplier Part Number 1=296-38557-1-ND, Thickness=1.2mm, Width=1.6mm

## Via types
v1: diameter 0.8, hole 0.4, Top Layer to Bottom Layer, 12 vias
v2: diameter 2, hole 1, Top Layer to Bottom Layer, 10 vias

## Nets (pads, with @x,y where several pads share a name; then routed paths per layer and width w, separated by ;. In a path a pad name is that pad's centre, name@x,y a point inside that pad or via, vN(x,y) a via of type N, cw(c..) or ccw(c..) an arc to the next point about the centre after c; other vN are vias at no path point)
1.8AVDD: C1.1 U1.5 U2.6 | length 5.3
  Bottom Layer w0.2: U1.5 91.495,75.47 91.495,75.899 91.522,75.926 91.522,77.732 91.376,77.878 C1.1 91.989,78.945 91.989,79.55 U2.6
1.8DVDD: C3.1 U2.3 U3.5 | length 5.2
  Bottom Layer w0.2: U2.3 93.192,78.846 93.526,78.513 93.526,78.414 94.222,77.718 94.49,77.718 94.824,77.384 94.824,75.982 94.457,75.614 U3.5
3V3: C7.1 D12.2 U4.5 | length 7.9
  Bottom Layer w0.5: U4.5 71.349,76.15 71.57,76.371 C7.1 71.57,79.19 73.533,81.153
  Bottom Layer w1: 73.798,81.153 ccw(c73.533,81.153) 73.798,81.153
+5V: C2.1 C5.1 C6.1 D13.2 J1.3 U1.1 U1.3 U3.1 U3.3 U4.1 U4.3 | length 74.3
  Bottom Layer w0.2: D13.2 67.996,72.755 69.406,71.345 C6.1@69.452,71.345
  Bottom Layer w0.5: C6.1 C6.1@69.293,71.501 ; U4.3 69.449,71.657 C6.1@69.293,71.501 ; 71.258,70.928 71.023,70.693 69.832,70.693 69.452,71.072 69.452,71.345 69.296,71.501 C6.1@69.293,71.501 ; 71.258,71.582 71.258,72.93 71.349,73.02 U4.1 ; U1.3 89.429,70.427 89.915,69.941 90.768,69.941 ; C2.1 C2.1@91.329,70.792 ; U1.1 C2.1@91.329,70.792 ; U3.3 92.557,70.729 C5.1 92.675,70.61 92.675,70.321 93.039,69.958 93.465,69.958 ; U3.1 94.457,70.522 93.892,69.958 93.465,69.958 ; 90.768,69.941 91.329,70.503 C2.1@91.329,70.792 ; 90.768,69.941 93.449,69.941 93.465,69.958
  Bottom Layer w1: U4.1 71.449,73.33 71.554,73.225 71.554,70.035 ; 74.803,78.994 73.533,77.724 73.533,71.374 72.194,70.035 71.554,70.035 ; 92.319,69.938 91.804,69.423 81.237,69.423 76.702,64.887 J1.3 76.502,62.787 76.502,65.087 71.554,70.035 ; 75.311,78.994 ccw(c74.803,78.994) 75.311,78.994
GND: C1.2 C2.2 C3.2 C4.2 C5.2 C6.2 C7.2 C8.2 C9.2 C10.2 C11.2 C12.2 C13.1 C14.1 C15.1 J1.8 R4.1 R5.1 U1.2 U2.4 U2.26 U2.29 U3.2 U4.2 | length 43.9
  Bottom Layer w0.2: R4.1 67.966,79.102 69.479,77.588 C7.2@70.407,77.588 ; C4.2 92.951,77.078 92.962,77.066 ; C4.2@92.504,77.066 92.962,77.066 ; 93.507,76.522 92.962,77.066 ; 98.437,73.56 98.437,78.183 95.478,81.142 U2.26 93.192,81.142 U2.29 U2.4 92.792,78.748 93.151,78.389 93.151,77.184 93.034,77.066 92.962,77.066
  Bottom Layer w0.5: C7.2 70.407,77.588 70.407,73.338 U4.2 70.413,73.316 70.413,71.515 C6.2 ; C2.2 90.379,70.642 U1.2 90.379,74.295 ; C1.2 90.379,76.535 90.379,74.295 ; C5.2 93.475,70.63 93.475,72.763 U3.2 93.507,74.168 ; C3.2 93.507,76.522 93.507,74.168 ; 90.379,74.295 90.506,74.168 93.507,74.168
  other v2: 66.802,61.087 96.52,63.119 89.281,64.008 60.452,72.009 102.108,73.66 101.219,90.678 60.198,90.805 89.315,100.032 72.999,101.516
GPIO0: J1.5 U2.1 | length 30.7
  Bottom Layer w0.2: J1.5 81.702,64.887 82.302,65.487 83.045,65.487 85.248,67.691 93.472,67.691 97.352,71.571 97.352,77.227 95.069,79.51 94.57,79.51 94.527,79.553 U2.1
GPIO1: J1.4 U2.2 | length 32.9
  Bottom Layer w0.2: J1.4 79.202,64.887 79.802,65.487 80.545,65.487 83.256,68.199 93.345,68.199 96.999,71.853 96.999,77.081 95.226,78.854 93.792,78.854 93.596,79.05 93.596,79.55 U2.2
LEDX1: R3.2 U2.24 | length 5.2
  Bottom Layer w0.2: U2.24 97.167,81.942 99.825,81.942 R3.2@99.904,81.862
LEDX2: R2.2 U2.25 | length 6.6
  Bottom Layer w0.2: U2.25 96.438,81.542 R2.2 R2.2@99.904,78.025
LEDX3: R1.2 U2.23 | length 6.5
  Bottom Layer w0.2: U2.23 96.611,82.342 97.533,83.264 99.909,85.64 R1.2@99.909,85.69
NetC4_1: C4.1 U2.5 | length 1.7
  Bottom Layer w0.2: U2.5 92.392,78.538 92.492,78.438 C4.1
NetD8_1: D8.1 R2.1 | length 26.1
  Top Layer w0.2: D8.1 81.41,78.865 82.054,78.865 82.599,79.41 82.599,80.519 83.578,81.498 98.357,81.498 v1(101.805,78.05)
  Bottom Layer w0.2: v1@101.755,78.05 101.87,78.165 102.245,78.165 103.106,79.025 R2.1@103.154,79.025
NetD9_1: D9.1 R3.1 | length 22.7
  Top Layer w0.2: D9.1@80.835,81.911 80.871,81.947 101.798,81.947 v1(101.805,81.954)
  Bottom Layer w0.2: v1(101.805,81.954) 101.92,82.069 102.221,82.069 102.229,82.077 102.32,82.077 103.106,82.862 R3.1@103.154,82.862
NetD11_1: D11.1 R1.1 | length 26
  Top Layer w0.2: D11.1@80.939,85.562 81.569,84.933 81.922,84.933 82.562,84.292 82.562,83.403 83.578,82.387 98.471,82.387 v1(101.805,85.721)
  Bottom Layer w0.2: v1@101.678,85.721 101.793,85.836 102.256,85.836 103.11,86.69 R1.1@103.159,86.69
NetD13_1: D13.1 R5.2 | length 1.4
  Bottom Layer w0.2: R5.2 65.795,70.745 D13.1
PD1: U2.7 | length 23
  Top Layer w3: v1@87.432,78.987 102.313,68.568
  Bottom Layer w0.2: v1(87.376,79.121) 88.059,79.804 91.589,79.804 U2.7@91.592,79.8 ; U2.7@91.589,79.847 91.592,79.844 U2.7@91.592,79.8 ; U2.7 U2.7@91.592,79.8
PD2: U2.8 | length 34.8
  Top Layer w3: v1(78.756,73.664) 78.798,73.622 78.798,54.847
  Bottom Layer w0.2: v1(78.756,73.664) 78.756,73.898 78.74,73.914 82.676,80.342 U2.8
PD3: U2.9 | length 36.1
  Top Layer w3: 62.409,62.048 v1@75.254,74.893
  Bottom Layer w0.2: v1(75.311,74.93) 81.123,80.742 U2.9
PD4: U2.10 | length 8
  Bottom Layer w0.2: 82.841,81.142 U2.10
PD5: U2.12 | length 40.1
  Top Layer w3: 51.653,84.297 70.612,84.339 v1@70.639,84.339
  Bottom Layer w0.2: v1(70.612,84.201) 80.264,84.201 82.523,81.942 U2.12
PD6: U2.13 | length 37
  Top Layer w3: 62.312,102.859 v1@75.158,90.014
  Bottom Layer w0.2: v1(75.184,90.043) 82.885,82.342 U2.13
PD7: U2.14 | length 36.4
  Top Layer w3: 78.636,109.669 v1@78.678,90.684
  Bottom Layer w0.2: v1(78.74,90.678) 78.74,87.099 83.097,82.742 U2.14
PD8: U2.15 | length 23.3
  Top Layer w3: v1@87.651,85.404 101.566,97.081
  Bottom Layer w0.2: v1(87.503,85.09) 89.313,83.28 91.589,83.28 91.589,83.276 91.592,83.28 U2.15
PDC: C8.1 C9.1 C10.1 C11.1 C12.1 C13.2 C14.2 C15.2 U2.11 | length 193.9
  Top Layer w1: 71.967,80.3 73.037,81.371 75.341,81.371 v2(75.533,81.562) ; 72.618,87.347 73.927,86.037 73.927,83.438 v2@75.533,81.832 ; 83.918,88.167 77.839,88.167 75.533,85.861 v2@75.533,81.832 ; 84.239,75.817 77.469,75.817 75.533,77.753 v2(75.533,81.562) ; v2(75.533,81.562) v2@75.533,81.832
  Top Layer w3: 51.716,80.735 71.486,80.78 71.967,80.3 ; 59.594,64.676 72.576,77.658 72.576,79.949 ; 59.772,100.192 72.618,87.347 ; 82.126,108.52 82.169,89.916 83.918,88.167 85.215,88.167 99.131,99.844 ; 82.36,54.91 82.345,61.465 82.317,73.895 84.342,75.92 85.394,75.92 100.275,65.5
  Bottom Layer w0.2: v2(75.533,81.562) 75.549,81.546 90.8,81.546 U2.11
SCL: J1.7 U2.27 | length 28
  Bottom Layer w0.2: J1.7 87.233,63.119 87.233,65.77 88.138,66.675 94.107,66.675 98.056,70.624 98.056,77.91 95.228,80.738 94.785,80.738 U2.27
SDA: J1.6 U2.28 | length 28.6
  Bottom Layer w0.2: J1.6 84.202,64.887 86.487,67.173 93.716,67.173 97.704,71.161 97.704,77.762 U2.28@95.128,80.338
VLED: D8.2 D9.2 D11.2 | length 7.1
  Top Layer w2: D8.2 D9.2 D11.2
  other v1: 77.978,79.502 77.978,80.645
pads on no net: D12.1 J1.1 J1.2 J1.25 R1.3 R2.3 R3.3 R4.2 U1.4 U2.16 U2.17 U2.18 U2.19 U2.20 U2.21 U2.22 U3.4 U4.4
copper on no net: | length 1.9
  Bottom Layer w0.2: 67.966,79.877 69.853,79.877

## Polygon pours and split planes (outlines as drawn)
GND on Bottom Layer "NONET_L-01_P-001" (solid, pour order 0): 79.239,112.209 83.432,112.016 88.766,110.746 94.608,108.206 99.561,104.65 102.99,100.84 105.784,96.649 108.07,91.061 109.213,85.981 109.34,81.155 108.705,76.837 107.562,72.646 105.784,68.455 103.244,64.772 100.704,61.724 97.656,59.057 93.846,56.517 89.02,54.358 84.067,53.215 80.257,52.961 75.431,53.215 70.224,54.612 65.271,56.644 60.572,59.692 56.762,63.502 54.349,67.185 52.571,70.868 50.793,76.202 50.158,80.901 50.412,85.854 51.428,91.315 53.079,95.506 55.873,100.078 59.429,104.142 64.001,107.698 70.097,110.619 75.304,111.889
GND on Top Layer "NONET_L-01_P-001" (solid, pour order 2): 80.206,112.46 76.013,112.266 70.679,110.996 64.837,108.456 59.884,104.9 56.455,101.09 53.661,96.899 51.375,91.311 50.232,86.231 50.105,81.405 50.74,77.087 51.883,72.896 53.661,68.705 56.201,65.022 58.741,61.974 61.789,59.307 65.599,56.767 70.425,54.608 75.378,53.465 79.188,53.211 84.014,53.465 89.221,54.862 94.174,56.894 98.873,59.942 102.683,63.752 105.096,67.435 106.874,71.118 108.652,76.452 109.287,81.151 109.033,86.104 108.017,91.565 106.366,95.756 103.572,100.328 100.016,104.392 95.444,107.948 89.348,110.869 84.141,112.139

## Silkscreen, mask and mechanical layers (free items; w line width, h text height)
Top Overlay:
  circle w1: c79.502,81.915 r5.97
  text "PPG" at 79.309,108.535 h1
  text "Group-59" at 78.01,105.319 h1
Mechanical 1:
  circle w0.25: c79.833,82.512 r30.094